# EAGLE board GDEnvSensorGW_1_15 (EAGLE 9.2.0)
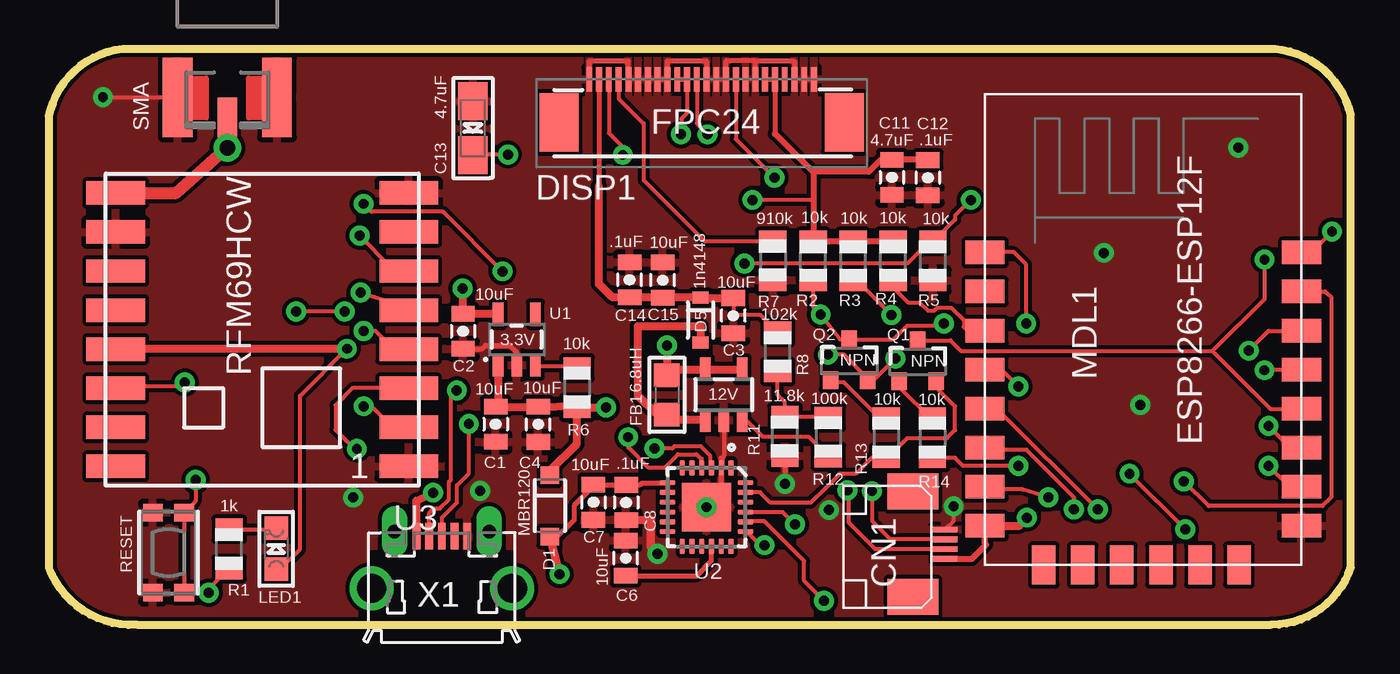
[diagram p0: board, top side]
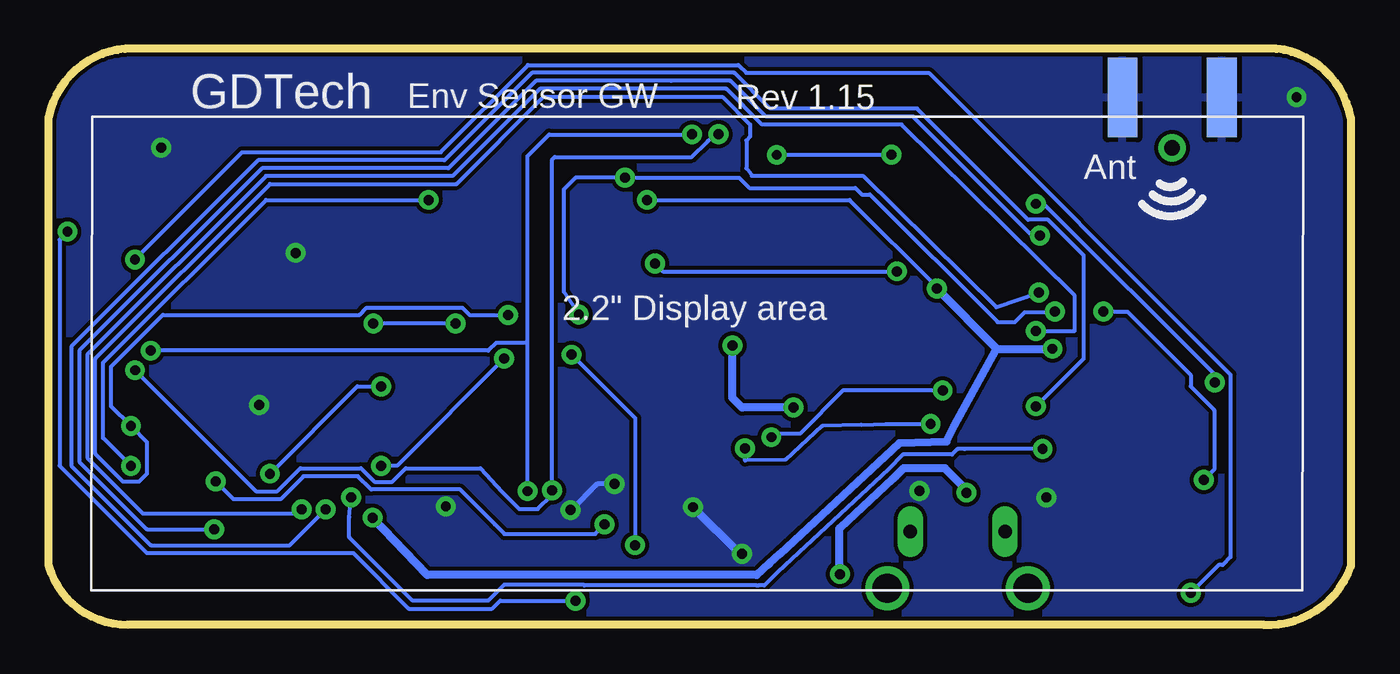
[diagram p1: board, bottom side, seen from below]

Size 66.64 x 29.5 mm. Coordinates in mm from the lower left corner, seen from the top.
Outline: 0,25.99 arc-74 3.8,29.5 62.74,29.5 arc-74 66.64,26.04 66.64,3 arc-74 62.59,0.01 4.49,0.01 arc-74 0,2.97 0,25.99
Copper layers (1*16): Top 0.035mm / dielectric 1.5mm / Bottom 0.035mm
Design rules "SparkFun": minimum track width 8mil, minimum drill 20mil, track to track 8mil, track to pad 8mil, pad to pad 8mil, via to via 8mil, smd to smd 8mil, copper to edge 8mil, drill to drill 8mil, minimum pad ring 12mil, minimum via ring 10mil, stop-mask expansion 4mil, vias tented up to drill 20mil, thermal gap 10mil

## Footprints (pad centres in the part's own frame; a part is rotated, then mirrored left to right if it is on the bottom)
SOT23-5 = smd 0.55 x 1.2: 1 -0.95,-1.3; 2 0,-1.3; 3 0.95,-1.3; 4 0.95,1.3; 5 -0.95,1.3
RFM12B-ANTENNA = drill 0.8 pad 1.422: P$1 0,0
0805-CAP = smd 0.8 x 1.2: 1 -0.9,0; 2 0.9,0
EIA3216-18/A-R = smd 1.95 x 1.5: + 1.375,0; - -1.375,0
FPC_0.5MM-4 = smd 0.3 x 1.25: 1 -0.75,-0.45; 2 -0.25,-0.45; 3 0.25,-0.45; 4 0.75,-0.45 | smd 1.85 x 2.6: MT -2.7,-2.1; MT2 2.7,-2.1
SOD-123 = smd 0.9 x 0.95: A 1.575,0; C -1.575,0
SOD-323 = smd 0.63 x 0.83: A 1.15,0; C -1.15,0
ER-OLED022 = smd 0.3 x 1.25: 1 5.75,12.905; 2 5.25,12.905; 3 4.75,12.905; 4 4.25,12.905; 5 3.75,12.905; 6 3.25,12.905; 7 2.75,12.905; 8 2.25,12.905; 9 1.75,12.905; 10 1.25,12.905; 11 0.75,12.905; 12 0.25,12.905; 13 -0.25,12.905; 14 -0.75,12.905; 15 -1.25,12.905; 16 -1.75,12.905; 17 -2.25,12.905; 18 -2.75,12.905; 19 -3.25,12.905; 20 -3.75,12.905; 21 -4.25,12.905; 22 -4.75,12.905; 23 -5.25,12.905; 24 -5.75,12.905 | smd 2 x 3: MOUNT1 -7.3,10.705; MOUNT2 7.3,10.705
_0805 = smd 1.2 x 1.3: 1 -1.016,0; 2 1.016,0
CHIPLED_0805 = smd 1.2 x 1.2: A 0,-1.05; C 0,1.05
ESP8266-ESP12E = smd 2 x 1.2: 1 0,16; 2 0,14; 3 0,12; 4 0,10; 5 0,8; 6 0,6; 7 0,4; 8 0,2; 9 16.2,2; 10 16.2,4; 11 16.2,6; 12 16.2,8; 13 16.2,10; 14 16.2,12; 15 16.2,14; 16 16.2,16 | smd 1.2 x 2: 17 11,0; 18 3,0; 19 5,0; 20 13,0; 21 7,0; 22 9,0
SOT23-3 = smd 0.8 x 0.9: 1 -0.95,-1; 2 0.95,-1; 3 0,1.1
R0805 = smd 1.1 x 1.4: 1 -1,0; 2 1,0
BTN_KMR2_4.6X2.8 = smd 0.9 x 1: A 2.05,0.8; A' -2.05,0.8; B 2.05,-0.8; B' -2.05,-0.8
QFN24_4MM_SMSC = smd 0.8 x 0.28: 1 -2,1.25; 2 -2,0.75; 3 -2,0.25; 4 -2,-0.25; 5 -2,-0.75; 6 -2,-1.25; 13 2,-1.25; 14 2,-0.75; 15 2,-0.25; 16 2,0.25; 17 2,0.75; 18 2,1.25 | smd 0.28 x 0.8: 7 -1.25,-2; 8 -0.75,-2; 9 -0.25,-2; 10 0.25,-2; 11 0.75,-2; 12 1.25,-2; 19 1.25,2; 20 0.75,2; 21 0.25,2; 22 -0.25,2; 23 -0.75,2; 24 -1.25,2 | smd 2.5 x 2.5: THERM 0,0
RFM69HCW-XXXS2 = smd 3 x 1.2: 1 -7.5,7; 2 -7.5,5; 3 -7.5,3; 4 -7.5,1; 5 -7.5,-1; 6 -7.5,-3; 7 -7.5,-5; 8 -7.5,-7; 9 7.5,-7; 10 7.5,-5; 11 7.5,-3; 12 7.5,-1; 13 7.5,1; 14 7.5,3; 15 7.5,5; 16 7.5,7
ZX62D-B-5PA8 = smd 1.35 x 0.4: 1 4.825,1.3; 2 4.825,0.65; 3 4.825,0; 4 4.825,-0.65; 5 4.825,-1.3 | drill 1.5: S1 2.15,-3.6; S2 2.15,3.6 | drill 0.7 long: S3 5.05,2.425; S4 5.05,-2.425
SMA_EDGELAUNCH_UFL = smd 4.064 x 1.524: GND@1 2.032,-2.54; GND@2 2.032,2.54 | smd 4.064 x 1.524 bottom: GND@3 2.032,2.54; GND@4 2.032,-2.54 | smd 2.032 x 1.016: P 3.048,0

## Placement (x,y rotation side)
12V  [SOT23-5]  34.55,11.79 0 top
ANT  RFM12B_ANTENNA  [RFM12B-ANTENNA]  9.14,24.43 0 top
C1  10uF  [0805-CAP]  22.87,10.27 270 top
C2  10uF  [0805-CAP]  21.2,15.03 270 top
C3  10uF  [0805-CAP]  35.04,15.84 90 top
C4  10uF  [0805-CAP]  25.05,10.27 90 top
C6  10uF  [0805-CAP]  29.53,3.42 90 top
C7  10uF  [0805-CAP]  27.88,6.28 270 top
C8  .1uF  [0805-CAP]  29.55,6.27 270 top
C11  4.7uF  [0805-CAP]  43.16,22.91 270 top
C12  .1uF  [0805-CAP]  45,22.9 270 top
C13  4.7uF  [EIA3216-18/A-R]  21.71,25.44 270 top
C14  .1uF  [0805-CAP]  29.73,17.67 90 top
C15  10uF  [0805-CAP]  31.42,17.66 90 top
CN1  1X4FPC0.5  [FPC_0.5MM-4]  46.33,4.13 270 top
D1  MBR120  [SOD-123]  25.64,6.1 270 top
D5  1n4148  [SOD-323]  33.36,15.61 270 top
DISP1  ER-OLED022  [ER-OLED022]  33.42,15.03 0 top
FB1  6.8uH  [_0805]  31.64,11.78 270 top
FRAME1  FRAME-LEDGER  [CREATIVE_COMMONS]  1.73,-12.1 0 top  (outside the outline)
LED1  [CHIPLED_0805]  11.64,3.9 0 top
MDL1  ESP8266-ESP12F  [ESP8266-ESP12E]  47.92,3.07 0 top
Q1  NPN  [SOT23-3]  44.47,13.47 0 top
Q2  NPN  [SOT23-3]  40.97,13.52 0 top
R1  1k  [R0805]  9.23,3.89 90 top
R2  10k  [R0805]  39.12,18.64 90 top
R3  10k  [R0805]  41.17,18.63 90 top
R4  10k  [R0805]  43.22,18.64 90 top
R5  10k  [R0805]  45.25,18.63 90 top
R6  10k  [R0805]  27.04,12.14 270 top
R7  910k  [R0805]  37.06,18.65 270 top
R8  102k  [R0805]  37.31,13.98 90 top
R11  11.8k  [R0805]  37.68,9.65 90 top
R12  100k  [R0805]  39.9,9.62 270 top
R13  10k  [R0805]  42.86,9.58 270 top
R14  10k  [R0805]  45.23,9.58 270 top
RESET  [BTN_KMR2_4.6X2.8]  6.13,3.7 90 top
U1  3.3V  [SOT23-5]  23.95,14.61 0 top
U2  [QFN24_4MM_SMSC]  33.67,6.03 270 top
U3  RFM69HCW  [RFM69HCW-XXXS2]  10.92,15.12 180 top
X1  ZX62D-B-5PA8  [ZX62D-B-5PA8]  20.12,-0.28 90 top
X2  SMA  [SMA_EDGELAUNCH_UFL]  9.14,29.04 270 top

## Library data of the parts
12V DISP1 U2 = GDTech
ANT = LowPowerLab; LABEL: ANT
C1-C4 C6-C8 C11 C12 C14 C15 = SparkFun-Capacitors; PROD_ID: CAP-11330
C13 FB1 LED1 RESET = microbuilder
CN1 R1-R8 R11-R14 X2 = adafruit
D1 = SparkFun-DiscreteSemi; PROD_ID: DIO-12440
D5 = SparkFun-DiscreteSemi; PROD_ID: DIO-09646
FRAME1 = SparkFun-Aesthetics
MDL1 = ESP12E
Q1 Q2 = SparkFun-DiscreteSemi; PROD_ID: TRANS-08049
U1 = SparkFun-PowerIC; PROD_ID: VREG-09872
U3 = SparkFun-RF; PROD_ID: IC-11997, IC-12053
X1 = GDTech; MF: Hirose; MPN: ZX62D-B-5PA8; OC_FARNELL: 2300438; OC_NEWARK: 69W0712

## Nets
3.3V: C2.1 C11.1 C12.1 CN1.4 DISP1.5 DISP1.6 LED1.A MDL1.8 R2.2 R3.2 R4.2 U1.5 U3.13
12V: C3.2 C14.1 C15.1 D5.C DISP1.23 R8.2
ADC: MDL1.2
ANT: ANT.P$1 U3.9 X2.P
CH_PD: MDL1.3 R4.1
D+: U2.3 X1.3
D-: U2.4 X1.2
DTR: Q1.2 R13.2 U2.23
GND: 12V.2 C1.2 C2.2 C3.1 C4.1 C6.2 C7.2 C8.2 C11.2 C12.2 C13.- C14.2 C15.2 CN1.1 DISP1.1 DISP1.2 DISP1.3 DISP1.7 DISP1.8 DISP1.10 DISP1.11 DISP1.12 DISP1.16 DISP1.17 DISP1.18 DISP1.19 DISP1.20 DISP1.24 MDL1.9 R5.1 R7.2 R11.1 RESET.A RESET.A' U1.2 U2.2 U2.THERM U3.1 U3.8 U3.10 X1.5 X2.GND@1 X2.GND@2 X2.GND@3 X2.GND@4
GPIO0: MDL1.12 Q1.3 R1.1
GPIO2: MDL1.11 R3.1 U3.5
GPIO12: MDL1.6 U3.2
GPIO13: MDL1.7 U3.3
GPIO14: MDL1.5 U3.4
GPIO15: MDL1.10 R5.2 U3.14
GPIO16: MDL1.4 U3.6
LDO_EN: R6.1 U1.3
N$1: U2.5 U2.6
N$3: LED1.C R1.2
N$4: C13.+ DISP1.22
N$5: C6.1 U2.16
N$8: 12V.1 D5.A FB1.2
N$9: Q2.1 R13.1
N$10: R8.1 R11.2 R12.1
N$11: DISP1.21 R7.1
N$15: 12V.3 R12.2
N$16: X1.4
N$17: Q1.1 R14.1
RESET: DISP1.9 MDL1.1 Q2.3 R2.1 RESET.B RESET.B'
RTS: Q2.2 R14.2 U2.19
RXD: MDL1.15 U2.21
SCL: CN1.2 DISP1.13 MDL1.14
SDA: CN1.3 DISP1.14 DISP1.15 MDL1.13
TXD: MDL1.16 U2.20
VIN: C7.1 C8.1 D1.A U2.7 U2.8 X1.1
VIN_PROT: 12V.4 12V.5 C1.1 C4.2 D1.C FB1.1 R6.2 U1.1

## Tracks (layer width: path | path; a pad name or v marks a point on that pad's centre or on a via)
3.3V  (via drill 0.51, 0.51 pad 1.02)
  Top 0.203: R3.2 43.21,19.63 R4.2 | LED1.A 11.84,2.86 12.86,3.88 12.86,11.73 15.24,14.12 | 39.13,21.76 v36.02,21.76
  Top 0.254: 37.17,25.15 DISP1.5 DISP1.6
  Top 0.305: 39.13,23.19 39.13,21.76 R2.2 R4.2 | 37.17,25.15 39.13,23.19 | C12.1 44.98,23.81 C11.1 42.58,23.81 41.97,23.2 39.14,23.2 39.13,23.19 | CN1.4 47.24,3.38 47.97,4.11 47.92,4.15 MDL1.8
  Top 0.406: U1.5 21.23,15.91 C2.1 21.18,15.95 v21.18,17.22 | U3.13 15.24,14.12 v15.26,14.14 | MDL1.8 49.68,5.07 v50.07,5.49
  Bottom 0.203: v36.02,21.76 25.66,21.76 21.19,17.29 v21.18,17.22
  Bottom 0.406: 18.1,14.14 v15.26,14.14 | 18.1,14.14 v21.18,17.22 | v50.07,5.49 47.27,2.56 30.48,2.57 30.41,2.55 29.77,3.12 29.22,3.63 23.11,9.31 20.68,9.38 20.29,10.21 18.16,14.08 18.1,14.14
12V
  Top 0.203: C3.2 35.04,15.95 35.1,15.89 36.4,15.89 R8.2
  Top 0.254: DISP1.23 28.17,22.47 28.15,22.46
  Top 0.406: C3.2 33.38,16.74 D5.C C15.1 C14.1 28.86,16.77 28.15,17.48 28.15,22.46
ANT
  Top 0.61: U3.9 6.52,22.12 ANT.P$1 9.16,24.92 X2.P
CH_PD
  Top 0.203: R4.1 43.22,17.28 43.98,16.52 44.57,16.52 45,16.09 45.33,16.09 45.48,16.24 46.19,16.24 46.83,15.6 46.83,15.26 47,15.09 47.91,15.09 MDL1.3
D+  (via drill 0.51 pad 1.02)
  Top 0.203: U2.3 33.86,8.08 33.86,8.65 33.37,9.14 32.03,9.14 31.92,9.03 v31,9.03 | v21.5,10.29 21.5,7.76 20.89,7.15 20.89,6.26 20.12,5.49 X1.3
  Bottom 0.203: v21.5,10.29 23.81,10.28 25.05,10.24 27.06,10.18 28.94,8.45 31,8.41 v31,9.03
D-  (via drill 0.51, 0.51 pad 1.02)
  Top 0.203: X1.2 19.47,5.73 19.7,5.95 20.01,5.95 20.48,6.43 20.48,7.32 20.59,7.43 20.59,11.7 v20.88,12 | U2.4 33.42,8.52 33.36,8.52 33.14,8.73 32.19,8.73 31.51,8.05 30.7,8.05 29.67,9.08 29.64,9.59 v29.66,9.61
  Bottom 0.203: v20.88,12 24.64,12.01 25.98,12.01 28.2,9.79 29.68,9.79 v29.66,9.61
DTR
  Top 0.203: Q1.2 45.57,12.41 45.57,12.01 46.38,11.19 46.38,9.97 45.98,9.57 43.94,9.57 42.93,8.55 R13.2 42.72,8.55 42.12,8.55 41.3,7.74 40.49,7.74 39.77,7.02 39,6.25 36.95,6.25 36.41,6.79 U2.23
GND  (via drill 0.51, 0.51 pad 1.02)
  Top 0.203: DISP1.11 DISP1.10 | DISP1.2 DISP1.1 | 34.39,8.55 34.39,8.15 U2.2 34.47,8.08 34.47,8.51 34.55,8.59 12V.2 | X2.GND@1 2.78,27.01 v2.77,27.02 | CN1.1 46.32,5.32 v46.32,6.07
  Top 0.254: DISP1.16 31.68,27.93 31.69,27.93 DISP1.16 | U2.2 34.42,6.78 U2.THERM | C2.2 22.16,14.13 22.35,14.32 23.59,14.32 23.94,13.97 U1.2 | R11.1 v37.68,7.23 v37.69,7.22 | DISP1.24 27.67,28.84 27.66,28.85 27.66,28.88 27.67,28.89 29.66,28.89 DISP1.20 | DISP1.12 33.66,28.89 31.9,28.89 31.92,28.89 31.67,28.89 31.67,28.88 DISP1.16 | DISP1.10 34.67,28.86 34.67,28.9 34.86,28.89 34.88,28.89 36.16,28.89 | DISP1.7 36.17,28.88 36.16,28.89 | 36.16,28.89 38.15,28.89 38.16,28.88 DISP1.3 | DISP1.17 DISP1.16
  Top 0.406: C8.2 30.78,5.37 30.8,5.39 30.8,3.98 v31.15,3.63
  Bottom 0.254: v37.69,7.22 38.57,7.22 39.94,5.85 v39.94,5.88
  Bottom 0.406: v31.15,3.63 31.27,3.63 U2.THERM
  other vias: 33.67,6.03 54,19.05 60.89,24.44 55.88,11.27 22.08,6.87 15.58,6.52
  pour Top: 4.08,30.46 62.57,29.62 arc-90 66.67,25.52 67.67,3.52 arc-90 63.07,-0.08 3.86,-0.02 arc-90 -0.05,3.04 -0.08,26.19 arc-90
  pour Bottom: 4.27,29.32 63.04,30.03 arc-90 67.77,24.82 66.77,3.52 arc-90 63.27,0.02 4.17,-1.38 arc-90 0.06,2.64 0.07,25.22 arc-90
GPIO0  (via drill 0.51)
  Top 0.203: Q1.3 46.16,14.57 46.7,14.03 59.56,14.03 | 59.56,14.03 62.53,11.06 64.11,11.06 MDL1.12 | v8.18,1.64 8.18,1.85 9.2,2.86 R1.1 | v62.23,18.71 62.23,16.68 59.59,14.04 59.56,14.03
  Bottom 0.203: v8.18,1.64 6.76,3.07 6.56,3.07 6.15,3.47 6.15,12.82 21.59,28.26 30.94,28.26 31.35,28.67 42.12,28.67 46.59,24.2 56.75,24.2 v62.23,18.71
GPIO2  (via drill 0.51)
  Top 0.203: v43.13,15.87 41.51,17.49 41.3,17.49 R3.1 | v62.44,10.18 63.45,9.16 64.06,9.16 MDL1.11 | v15.97,17.02 18.34,16.27 U3.5
  Bottom 0.203: v15.97,17.02 18.14,16.27 24.97,22.99 30.66,22.99 30.94,23.39 30.94,24.81 30.74,25.01 30.74,25.62 32.16,27.04 41.3,27.04 45.77,22.57 55.32,22.57 64.26,13.63 64.26,8.76 62.84,7.33 62.03,7.33 61.62,7.74 61.62,9.36 v62.44,10.18 63.45,11.19 63.45,13.23 60.81,15.87 50.74,15.87 50.37,16.24 45.48,16.24 45.11,15.87 v43.13,15.87
GPIO12  (via drill 0.51)
  Top 0.203: v52.48,5.91 52.48,6.52 50.04,8.96 48.01,8.96 MDL1.6 | v16.11,11.19 16.51,11.19 17.53,10.18 18.34,10.18 U3.2
  Bottom 0.203: v52.48,5.91 54.31,4.08 61.42,4.08 65.48,8.15 65.48,14.24 55.93,23.79 46.38,23.79 41.91,28.26 31.55,28.26 29.72,26.43 22.2,26.43 16.51,20.74 15.5,20.74 13.67,18.92 13.67,13.63 v16.11,11.19
GPIO13  (via drill 0.51, 0.51 pad 1.02)
  Top 0.203: v51.17,6.52 49.84,6.93 48.01,6.93 MDL1.7 | U3.3 15.55,12.12 14.67,11.24 14.67,9.99 15.66,9 15.75,9 v15.77,9.02
  Bottom 0.203: v51.17,6.52 51.26,5.5 51.26,4.49 48.01,1.24 44.15,1.24 43.33,2.05 39.27,2.05 39.24,2.02 30.4,2.02 30.35,2 30.32,2.02 30.01,2.02 29.35,2.68 23.66,7.97 22.91,8.72 20.41,8.72 20.12,9.01 19.77,9.01 18.11,9.02 v15.77,9.02
GPIO14  (via drill 0.51)
  Top 0.203: v53.7,5.91 48.62,10.99 48.01,10.99 MDL1.5 | v16.11,15.05 16.72,15.05 17.53,14.24 18.34,14.24 U3.4
  Bottom 0.203: v53.7,5.91 53.9,5.71 61.83,5.71 64.67,8.55 64.67,13.84 55.53,22.98 45.98,22.98 41.51,27.45 31.96,27.45 30.13,25.62 22.99,25.62 14.12,16.86 14.12,15.06 v16.11,15.05
GPIO15  (via drill 0.51)
  Top 0.203: v47.2,21.76 46.38,20.95 46.38,20.74 45.37,19.73 R5.2 45.16,19.73 43.94,18.51 v35.61,18.51 | v62.44,8.15 63.45,7.13 64.06,7.13 MDL1.10 | v6.96,12.41 6.76,12.21 3.51,12.21 U3.14 | v16.11,21.56 16.51,21.15 20.17,21.15 v23.22,18.1
  Bottom 0.203: v47.2,21.76 55.53,21.76 63.86,13.43 63.86,9.57 v62.44,8.15 | v6.96,12.41 6.96,12.82 15.7,21.56 v16.11,21.56 | v23.22,18.1 35.21,18.1 v35.61,18.51
GPIO16  (via drill 0.51)
  Top 0.203: v49.63,12.21 48.82,13.02 48.01,13.02 MDL1.4 | v58.17,4.89 v55.32,7.74 | v15.9,19.93 17.53,18.31 18.34,18.31 U3.6
  Bottom 0.203: v49.63,12.21 50.85,12.21 v55.32,7.74 | v58.17,4.89 61.62,4.89 65.08,8.35 65.08,14.04 55.73,23.39 46.18,23.39 41.71,27.86 34.77,27.86 31.75,27.86 29.92,26.03 22.41,26.03 16.31,19.93 v15.9,19.93
LDO_EN
  Top 0.203: U1.3 25.05,13.23 26.88,13.23 R6.1
N$1
  Top 0.254: U2.6 U2.5
N$3
  Top 0.203: R1.2 11.59,4.89 LED1.C
N$4  (via drill 0.51 pad 1.02)
  Top 0.203: DISP1.22 28.67,25.18 29.36,24.49 29.36,24.09 v29.38,24.07 | v23.5,24.09 21.73,24.09 C13.+
  Bottom 0.203: v29.38,24.07 23.52,24.07 v23.5,24.09
N$5
  Top 0.254: C6.1 33.17,2.52 33.92,3.27 U2.16
N$8
  Top 0.406: 12V.1 31.91,10.49 FB1.2 31.13,10.76 30.16,11.73 30.16,13.9 30.15,15.3 33.36,15.3 D5.A
N$9
  Top 0.203: Q2.1 40.08,12.41 40.69,12.41 42.72,10.38 R13.1
N$10
  Top 0.203: R8.1 37.31,11.78 37.68,11.41 R11.2 39.87,10.65 R12.1
N$11
  Top 0.203: DISP1.21 29.17,26.95 30.45,25.67 30.45,22.77 33.57,19.65 R7.1
N$15
  Top 0.203: 12V.3 35.69,10.49 36.54,9.64 38.88,9.64 R12.2
N$17
  Top 0.203: Q1.1 43.52,12.19 45.22,10.49 R14.1
RESET  (via drill 0.51 pad 1.02)
  Top 0.203: RESET.B' RESET.B 7.51,6.33 v7.51,7.42 | v45.82,15.43 45.72,15.32 43.94,15.32 43.24,14.62 Q2.3 40.49,14.62 v39.51,15.9 39.12,16.28 R2.1 | v50.03,15.43 50.03,18.45 49.4,19.08 MDL1.1 | DISP1.9 35.17,24.88 v37.15,22.9 | v15.15,16.04 v12.66,16.04
  Bottom 0.203: v45.82,15.43 v50.03,15.43 | v39.51,15.9 40.29,17.06 40.29,22.3 39.69,22.9 v37.15,22.9 31.31,22.9 30.78,22.37 25.36,22.37 25.03,22.04 24.61,22.04 18.07,15.5 17.2,15.5 16.68,16.02 15.17,16.02 v15.15,16.04 | v12.66,16.04 11.42,16.04 8.19,12.81 8.19,12.21 6.98,11 6.98,7.95 v7.51,7.42
RTS  (via drill 0.51)
  Top 0.203: v36.63,4.08 36.43,4.08 35.82,4.69 U2.19 | v39.88,13.84 40.69,13.84 41.91,12.62 Q2.2 42.12,12.41 v43.33,13.63 | v49.63,8.15 46.79,8.15 46.38,8.55 45.37,8.55 R14.2
  Bottom 0.203: v36.63,4.08 36.63,10.58 v39.88,13.84 | v49.63,8.15 48.82,8.15 v43.33,13.63
RXD  (via drill 0.51 pad 1.02)
  Top 0.203: U2.21 37.56,5.78 v38.19,5.15 | MDL1.15 65.33,17.07 65.42,16.98 65.44,16.98 65.64,16.78 65.64,6.54 65.19,6.09 59.37,6.09 v58.11,7.35
  Bottom 0.203: v58.11,7.35 57.19,6.43 54.78,6.43 53.6,7.61 50.82,7.61 50.14,6.93 45.58,6.93 43.8,5.15 43.8,5.14 43.32,4.66 38.68,4.66 v38.19,5.15
SCL  (via drill 0.51, 0.51 pad 1.02)
  Top 0.203: DISP1.13 33.17,25.67 v33.72,25.12 | v61.42,14.04 62.44,15.05 64.06,15.05 MDL1.14 | CN1.2 43.08,4.38 42.16,5.3 42.16,6.83 v42.14,6.85
  Bottom 0.203: v42.14,6.85 42.14,14.44 | 42.14,14.44 42.14,24 41.03,25.11 v33.73,25.11 v33.72,25.12 | v61.42,14.04 44.15,14.04 43.74,14.44 42.14,14.44
SDA  (via drill 0.51 pad 1.02)
  Top 0.203: MDL1.13 62.26,13.07 v62.23,13.04 | DISP1.14 32.67,26.2 32.38,25.92 32.38,25.14 v32.37,25.13 | CN1.3 42.31,3.88 40.96,5.23 40.96,6.8 v40.88,6.88
  Top 0.254: DISP1.15 DISP1.14
  Bottom 0.203: v62.23,13.04 56.03,6.84 54.95,6.84 53.77,8.02 50.66,8.02 49.97,7.33 49.06,7.33 48.37,8.02 44.54,8.02 43.46,6.83 42.56,5.93 41.62,5.93 40.88,6.67 v40.88,6.88 40.88,23.83 40.75,23.96 33.73,23.96 32.91,24.78 32.56,25.14 v32.37,25.13
TXD  (via drill 0.51)
  Top 0.203: v39.68,1.24 38.66,2.25 38.66,3.27 36.63,5.3 35.82,5.3 U2.20 | v65.69,20.13 64.67,19.12 64.26,19.12 MDL1.16
  Bottom 0.203: v39.68,1.24 43.54,1.24 43.94,0.83 48.21,0.83 51.06,3.68 61.62,3.68 66.09,8.15 66.09,19.73 v65.69,20.13
VIN  (via drill 0.51 pad 1.02)
  Top 0.254: D1.A 25.85,4.32 26.89,5.36 26.89,6.12 27.88,7.11 C7.1 C8.1 30.27,7.17 30.37,7.27 U2.7 U2.8
  Top 0.406: X1.1 18.82,6.36 v19.67,6.77 | D1.A 26.07,2.84 v26.14,2.6
  Bottom 0.406: v19.67,6.77 19.67,6.92 20.77,8.02 22.88,8.02 23.3,7.6 23.45,7.46 23.46,7.46 26.13,4.98 26.19,4.92 26.19,2.65 v26.14,2.6
VIN_PROT  (via drill 0.51 pad 1.02)
  Top 0.406: U1.1 23,11.3 C1.1 24.77,11.17 C4.2 26.96,11.22 R6.2 | D1.C 25.64,7.88 27.03,9.27 R6.2 | R6.2 28.51,11.14 v28.53,11.13 | v31.64,14.3 FB1.1 31.93,13.09 12V.5 12V.4
  Bottom 0.406: v28.53,11.13 31.15,11.13 31.65,11.63 v31.65,14.29 v31.64,14.3

## Text on the board
bPlace: Rev 1.15 | Env Sensor GW | GDTech | Ant